# Altium PCB PCB.PcbDoc
Units mm, origin at the board's own origin, x right, y up, seen from the top; angles counter-clockwise.
Board outline 30.6 x 15.3 mm, 2 copper layers (Top Layer, Bottom Layer), stack 0.981 mm thick; 4 components, 8 nets, 36 pads, 0 vias.
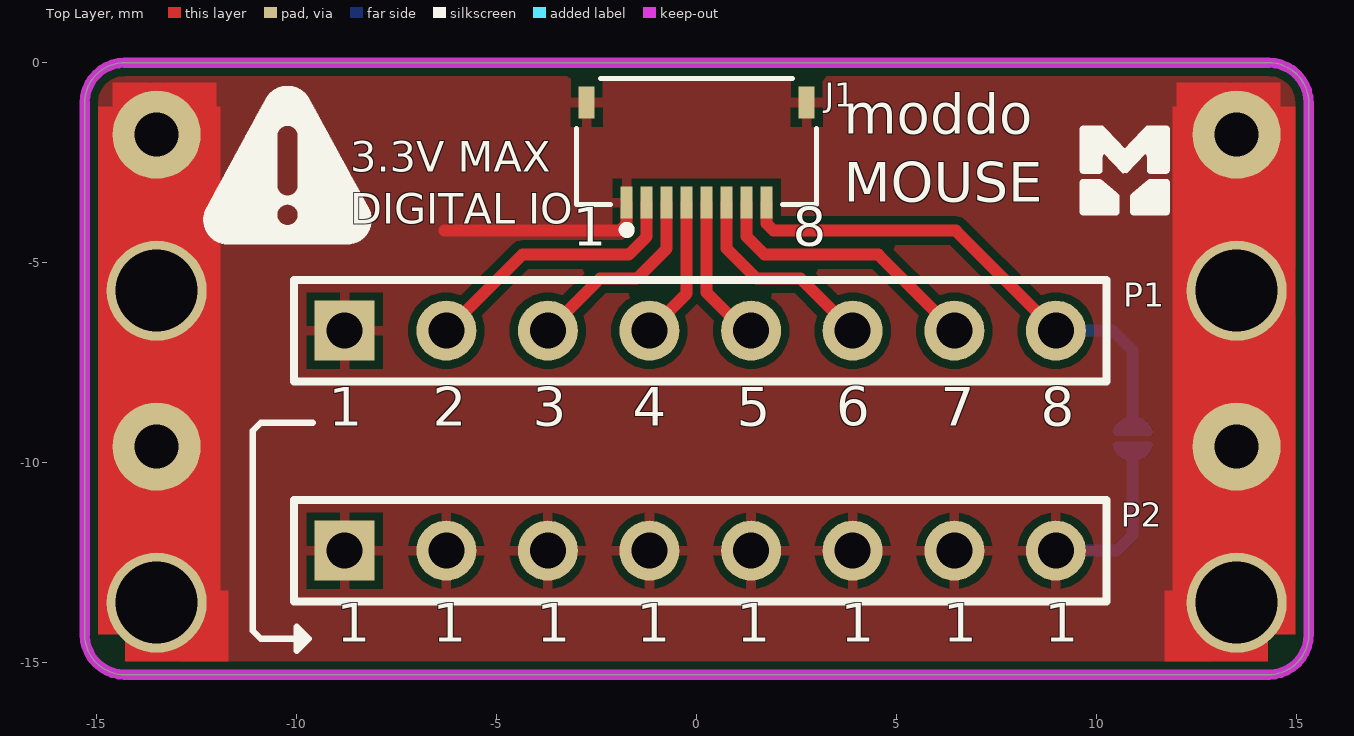
[diagram p0: Top Layer view]
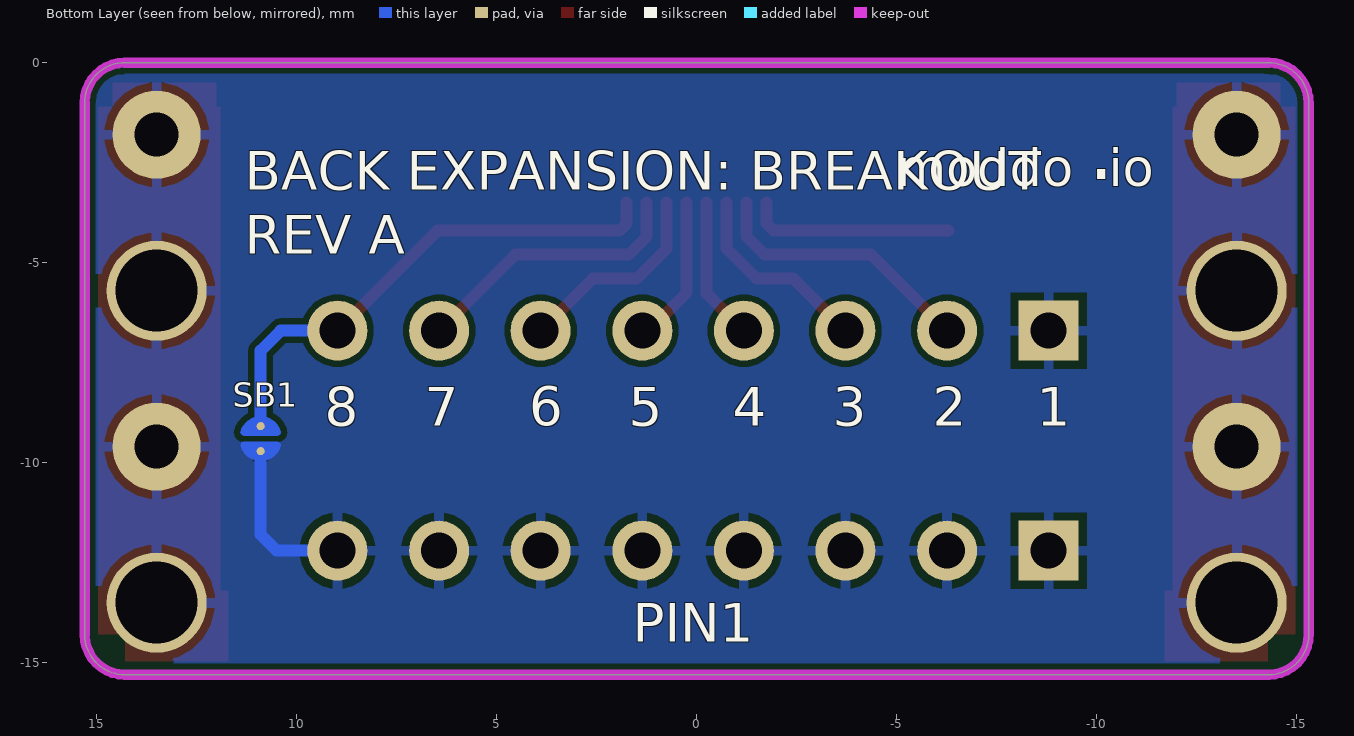
[diagram p1: Bottom Layer view, seen from below]

## Layer stack, top to bottom
Top Solder: solder mask 0.0102, Solder Resist, Dk 3.5
Top Layer: signal copper 0.0356
Dielectric 1: dielectric 0.91, FR-4, Dk 4.8
Bottom Layer: signal copper 0.0356
Bottom Solder: solder mask 0.0102, Solder Resist, Dk 3.5

## Board outline
-15.3,-14.3 -15.3,-1 cw(c-14.3,-1) -14.3,0 14.3,0 cw(c14.3,-1) 15.3,-1 15.3,-14.3 cw(c14.3,-14.3) 14.3,-15.3 -14.3,-15.3 cw(c-14.3,-14.3)

## Design rules (kind name [scope] priority, off if disabled: settings)
BoardOutlineClearance [All] p1: gap=0.2 ignorepadtopadclearanceinfootprint=FALSE
Clearance GND_bot [InNamedPolygon('GND_bot')] p1: gap=0.2 ignorepadtopadclearanceinfootprint=FALSE
Clearance GND_top [InNamedPolygon('GND_top')] p2: gap=0.1 ignorepadtopadclearanceinfootprint=FALSE
Clearance [All] p3: gap=0.15 ignorepadtopadclearanceinfootprint=FALSE
HoleSize [All] p1: absolutevalues=TRUE maxlimit=20 minlimit=0.025 maxpercent=80.000 minpercent=20.000
MinimumSolderMaskSliver [All] p1: minsoldermaskwidth=0.05
PolygonConnect [All] p1: thpad.connectstyle=Relief thpad.reliefconductorwidth=0.254 thpad.reliefentries=4 thpad.polygonreliefangle="90 Angle" thpad.airgapwidth=0.2 smdpad.connectstyle=Relief smdpad.reliefconductorwidth=0.254 smdpad.reliefentries=4 smdpad.polygonreliefangle="90 Angle" smdpad.airgapwidth=0.2 via.connectstyle=Direct via.reliefconductorwidth=0.254 via.reliefentries=4 via.polygonreliefangle="90 Angle" via.airgapwidth=0.254
RoutingVias [All] p1: holewidth=0.3 width=0.4 viastyle="Through Hole" minholewidth=0.3 minwidth=0.4 maxholewidth=2 maxwidth=10
SilkToSilkClearance [All] p1: silktosilkclearance=0.01
SilkToSolderMaskClearance [IsPad] p1: minsilkscreentomaskgap=0.001 clearancetoexposedcopper=TRUE
SolderMaskExpansion [All] p1: expansion=0.05 istentingtop=FALSE
UnRoutedNet [All] p1: checkbadconnections=TRUE
Width [All] p1: maxlimit=2.54 minlimit=0.089 preferedwidth=0.254
25 further rules are at their usual default settings.

## Components (designator, comment, footprint, x,y, rotation, side; value= is the part's Value field where it differs from the comment)
J1 "2328702-8" 2328702-8 0,-0.15 r180 top
P1 "Header 8" HDR1X8 -8.8,-6.7 r0 top
P2 "Header 8" HDR1X8 -8.8,-12.2 r0 top
SB1 "Solderbridge" Solderbridge 10.9,-9.4 r90 bottom

## Footprints (in the part's own frame and the unit in brackets; to place one, negate y for a bottom-side part, rotate by r counter-clockwise, add the part's x,y. Pads: shape width x height; smd on the part's side, far side on the other; paste and mask are expansions set on the pad)
2328702-8 [mm]
  rect 0.3x0.8 smd mask+0.05: 1(1.75,3.35) 2(1.25,3.35) 3(0.75,3.35) 4(0.25,3.35) 5(-0.25,3.35) 6(-0.75,3.35) 7(-1.25,3.35) 8(-1.75,3.35)
  rect 0.4x0.8 smd mask+0.05: S1(2.75,0.85) S2(-2.75,0.85)
  silkscreen extent -3,0.25 3,4.13, body extent -3,0.25 3,4.08, height 1.06
HDR1X8 [mm] "Connector; Header; 8 Position"
  rect 1.5x1.5 hole 0.9: 1(0,0)
  round 1.5 hole 0.9: 2(2.54,0) 3(5.08,0) 4(7.62,0) 5(10.16,0) 6(12.7,0) 7(15.24,0) 8(17.78,0)
  silkscreen extent -1.27,-1.27 19.05,1.27
Solderbridge [mm]
  round 0.2 smd paste-10: 1(-0.312,0) 2(0.312,0)
  Top Layer region: -0.077,-0.432 -0.152,-0.505 -0.271,-0.467 -0.335,-0.424 -0.409,-0.351 -0.462,-0.292 -0.521,-0.193 -0.549,-0.099 -0.544,0.122 -0.518,0.193 -0.434,0.33 -0.351,0.411 -0.259,0.469 -0.157,0.5 -0.107,0.483 -0.077,0.43
  Top Layer region: 0.077,0.432 0.152,0.505 0.271,0.467 0.335,0.424 0.409,0.351 0.462,0.292 0.521,0.193 0.549,0.099 0.544,-0.122 0.518,-0.193 0.434,-0.33 0.351,-0.411 0.259,-0.469 0.157,-0.5 0.107,-0.483 0.077,-0.43
  Top Layer lines w0.152: -0.153,-0.431 cw(c-0.042,0) -0.471,-0.118 cw(c-0.042,0) -0.487,0 cw(c-0.042,0) -0.471,0.118 cw(c-0.042,0) -0.153,0.431 ; 0.153,-0.431 ccw(c0.042,0) 0.312,-0.353 ccw(c0.042,0) 0.487,0 ccw(c0.042,0) 0.153,0.431

## Part data
J1: "FFC/FPC Connector, 8 Contact(s), 1 Row(s), Right Angle, Solder Terminal, Natural Insulator", Actuator Color=Black, Flammability Rating="UL94 V-0", Housing Color=Natural, Manufacturer="TE Connectivity", Max Operating Temperature=85°C, Min Operating Temperature=-40°C, Operating Supply Voltage=50V, Actuator Material=Thermoplastic, Category="FFC / FPC", ComponentLink1Description=https://www.te.com/commerce/DocumentDelivery/DDEController?Action=srchrtrv&amp;DocNm=2328702&amp;DocType=Customer+Drawing&amp;DocLang=English&src-supplier=Digikey, ComponentLink1URL=https://www.te.com/commerce/DocumentDelivery/DDEController?Action=srchrtrv&amp;DocNm=2328702&amp;DocType=Customer+Drawing&amp;DocLang=English&src-supplier=Digikey, Connector System=Wire-to-Board, Contact Material="Copper Alloy", Contact Plating=Gold, Gender=Receptacle, Height=1mm, Housing Material=Thermoplastic, Length=6mm, Manufacturer Part Number=2328702-8, Mounting Technology="Surface Mount", Number of Contacts=8, Number of Positions=8, Number of Rows=1, Orientation="Right Angle", Packaging="Cut Tape", Plating=Gold, Pricing 1="28000=0.0961 (USD)", RoHS=Yes, Sealable="No (Without)", Series=-, Stock 1=56000, Supplier 1="Arrow Electronics", Supplier Part Number 1=2328702-8, Termination=Solder, Voltage Rating=50V
P1 P2: "Header, 8-Pin", Manufacturer=N/A, LatestRevisionDate=17-Jul-2002, LatestRevisionNote="Re-released for DXP Platform.", Manufacturer Part Number=N/A, Publisher="Altium Limited"
SB1: library part SOLDERBRIDGE, Artikkelnr Noca=N.A., Artikkelnr Simpro=N.A., Footprint Doc=Solderbridge, LatestRevisionDate=2009-12-14, Part Number=Solderbridge, Pin Count=2, Published=2009-12-14, Publisher="Nordic Semiconductor"

## Free pads (board coordinates)
  round 2.5 hole 2.05: ""(-13.5,-13.5) ""(-13.5,-5.7) ""(13.5,-13.5) ""(13.5,-5.7)
  round 2.2 hole 1.1: ""(-13.5,-9.6) ""(-13.5,-1.8) ""(13.5,-9.6) ""(13.5,-1.8)

## Nets (pads, with @x,y where several pads share a name; then routed paths per layer and width w, separated by ;. In a path a pad name is that pad's centre, name@x,y a point inside that pad or via, vN(x,y) a via of type N, cw(c..) or ccw(c..) an arc to the next point about the centre after c; other vN are vias at no path point)
PIN1: J1.1 J1.S1 J1.S2 P1.1 P2.1 P2.2 P2.3 P2.4 P2.5 P2.6 P2.7 P2.8 pad. SB1.1 | length 9.3
  Top Layer w0.3: -6.3,-4.2 -1.926,-4.2 -1.75,-4.024 J1.1
  Bottom Layer w0.3: P2.8 10.5,-12.2 10.9,-11.8 10.9,-9.887 10.9,-9.871 SB1.1
PIN2: J1.2 P1.2 | length 6.8
  Top Layer w0.3: P1.2 -4.36,-4.8 -1.7,-4.8 -1.25,-4.35 J1.2
PIN3: J1.3 P1.3 | length 5
  Top Layer w0.3: P1.3 -2.42,-5.4 -1.5,-5.4 -0.75,-4.65 J1.3
PIN4: J1.4 P1.4 | length 3.6
  Top Layer w0.3: P1.4 -0.25,-5.77 J1.4
PIN5: J1.5 P1.5 | length 3.8
  Top Layer w0.3: J1.5 0.25,-5.75 1.2,-6.7 P1.5
PIN6: J1.6 P1.6 | length 5.1
  Top Layer w0.3: J1.6 0.75,-4.65 1.5,-5.4 2.6,-5.4 P1.6
PIN7: J1.7 P1.7 | length 7
  Top Layer w0.3: J1.7 1.25,-4.35 1.7,-4.8 4.54,-4.8 P1.7
PIN8: J1.8 P1.8 SB1.2 | length 12.9
  Top Layer w0.3: J1.8 1.75,-4.024 1.926,-4.2 6.48,-4.2 P1.8
  Bottom Layer w0.3: P1.8 10.4,-6.7 10.9,-7.2 10.9,-8.913 SB1.2

## Polygon pours and split planes (outlines as drawn)
PIN1 on Top Layer "PIN1_L01_P000" (solid, pour order 0): -15.3,-14.3 -15.3,-1 cw(c-14.3,-1) -14.3,0 14.3,0 cw(c14.3,-1) 15.3,-1 15.3,-14.3 cw(c14.3,-14.3) 14.3,-15.3 -14.3,-15.3 cw(c-14.3,-14.3)
PIN1 on Bottom Layer "PIN1_L02_P001" (solid, pour order 1): -15.3,-14.3 -15.3,-1 cw(c-14.3,-1) -14.3,0 14.3,0 cw(c14.3,-1) 15.3,-1 15.3,-14.3 cw(c14.3,-14.3) 14.3,-15.3 -14.3,-15.3 cw(c-14.3,-14.3)

## Keep-outs
Keep-Out Layer:
  the board outline again, w0.254

## Other copper
Top Layer:
  region net PIN1: 14.97,-1.1 11.9,-1.1 11.9,-14.3 14.97,-14.3
  region net PIN1: 14.6,-0.5 12,-0.5 12,-1.7 14.6,-1.7
  rectangle net PIN1: -14.6,-1.7 -12,-0.5
  region net PIN1: 14.287,-13.2 11.7,-13.2 11.7,-14.965 14.287,-14.965
  rectangle net PIN1: -14.287,-14.965 -11.7,-13.2
  rectangle net PIN1: -14.97,-14.3 -11.9,-1.1

## Silkscreen, mask and mechanical layers (free items; w line width, h text height)
Top Overlay:
  drawing of 13 lines, arcs and shapes, not listed
  text "moddo / MOUSE" at 3.682,-3.804 h1.7
  text "3.3V MAX / DIGITAL IO" at -8.662,-4.28 h1.3
  text "1" at -3.1,-4.9 h1.65
  text "8" at 2.4,-4.9 h1.65
  text "1" at -9.2,-9.4 h1.65
  text "2" at -6.6,-9.4 h1.65
  text "3" at -4.1,-9.4 h1.65
  text "4" at -1.6,-9.4 h1.65
  text "5" at 1,-9.4 h1.65
  text "6" at 3.492,-9.385 h1.65
  text "7" at 6.1,-9.4 h1.65
  text "8" at 8.6,-9.4 h1.65
  text "1" at -9,-14.8 h1.65
  text "1" at -6.6,-14.8 h1.65
  text "1" at -4,-14.8 h1.65
  text "1" at -1.5,-14.8 h1.65
  text "1" at 1,-14.8 h1.65
  text "1" at 3.6,-14.8 h1.65
  text "1" at 6.16,-14.8 h1.65
  text "1" at 8.7,-14.8 h1.65
Bottom Overlay:
  text "io" at -10.3,-3.4 h1.6
  text "." at -9.8,-3.4 h2.5
  text "moddo" at -5,-3.4 h1.6
  text "BACK EXPANSION: BREAKOUT" at 11.3,-3.5 h1.65
  text "REV A" at 11.3,-5.1 h1.65
  text "1" at -8.5,-9.4 h1.65
  text "2" at -5.9,-9.4 h1.65
  text "3" at -3.4,-9.4 h1.65
  text "4" at -0.9,-9.4 h1.65
  text "5" at 1.7,-9.4 h1.65
  text "6" at 4.192,-9.385 h1.65
  text "7" at 6.8,-9.4 h1.65
  text "8" at 9.3,-9.4 h1.65
  text "PIN1" at 1.6,-14.8 h1.65